# Altium PCB NBIOT.PcbDoc (part 3 of 3)
Units mm, origin at the board's own origin, x right, y up, seen from the top; angles counter-clockwise.
Board outline 152.4 x 101.6 mm, 2 copper layers (Top Layer, Bottom Layer); 66 components, 55 nets, 202 pads, 65 vias.
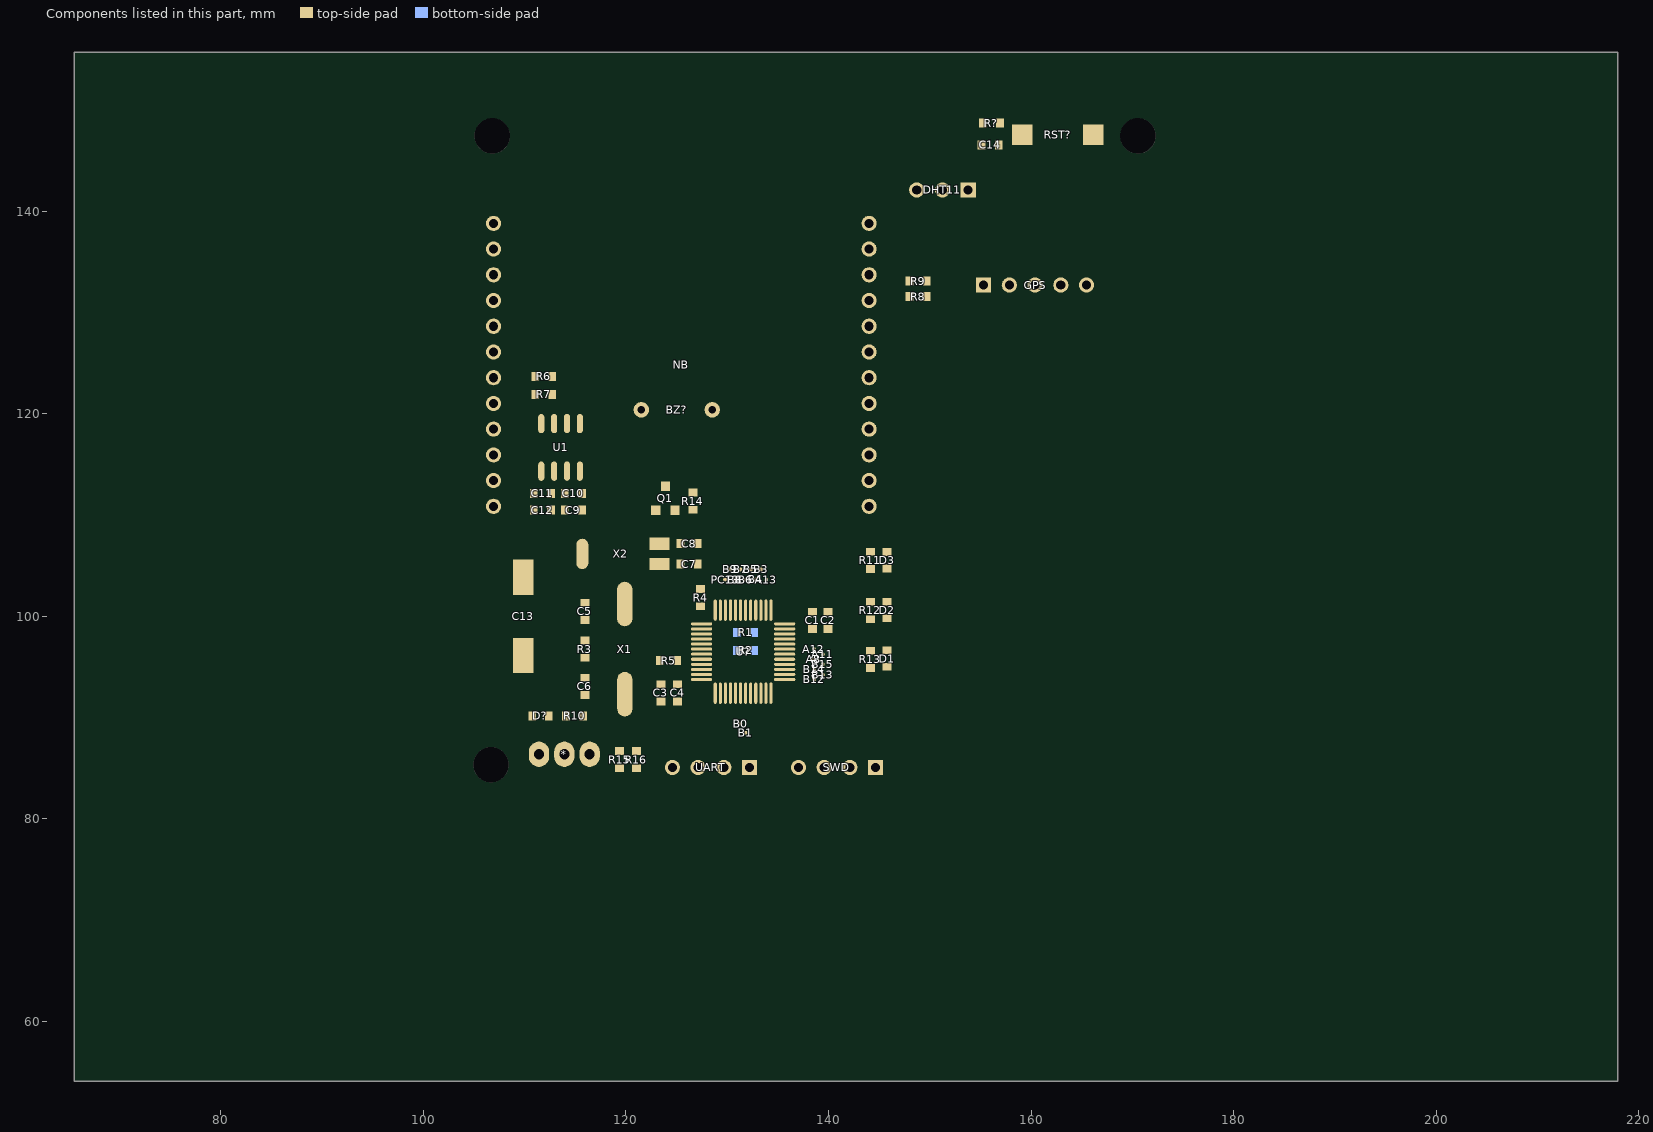
[diagram p3: the components of this part, seen from the top]

## Via types
v1: diameter 0.457, hole 0.305, Top Layer to Bottom Layer, 57 vias
v2: diameter 1.27, hole 0.711, Top Layer to Bottom Layer, 6 vias
v3: diameter 2.032, hole 1.27, Top Layer to Bottom Layer, 2 vias

## Nets (pads, with @x,y where several pads share a name; then routed paths per layer and width w, separated by ;. In a path a pad name is that pad's centre, name@x,y a point inside that pad or via, vN(x,y) a via of type N, cw(c..) or ccw(c..) an arc to the next point about the centre after c; other vN are vias at no path point) (continued)
copper on no net: (continued)
  Top Layer w0.015: 166.558,140.548 166.726,140.548 ; 166.558,140.564 166.726,140.564 ; 166.558,140.579 166.726,140.579 ; 166.573,137.912 167.869,137.912 ; 166.573,137.927 167.869,137.927 ; 166.573,137.942 167.869,137.942 ; 166.573,137.958 167.869,137.958 ; 166.573,137.973 167.869,137.973 ; 166.573,138.003 167.853,138.003 ; 166.573,140.122 166.832,140.122 ; 166.573,140.137 166.832,140.137 ; 166.573,140.152 166.832,140.152 ; 166.573,140.167 166.832,140.167 ; 166.573,140.183 166.832,140.183 ; 166.573,140.198 166.832,140.198 ; 166.573,140.213 166.787,140.213 ; 166.573,140.228 166.787,140.228 ; 166.573,140.244 166.787,140.244 ; 166.573,140.259 166.787,140.259 ; 166.573,140.274 166.787,140.274 ; 166.573,140.289 166.787,140.289 ; 166.573,140.305 166.787,140.305 ; 166.573,140.32 166.787,140.32 ; 166.573,140.335 166.787,140.335 ; 166.573,140.35 166.787,140.35 ; 166.573,140.365 166.787,140.365 ; 166.573,140.381 166.741,140.381 ; 166.573,140.396 166.741,140.396 ; 166.573,140.411 166.741,140.411 ; 166.573,140.426 166.741,140.426 ; 166.573,140.442 166.741,140.442 ; 166.588,137.988 166.604,137.988 ; 166.588,144.8 166.832,144.8 ; 166.619,137.988 167.853,137.988 ; 166.619,138.019 167.869,138.019 ; 166.619,138.034 167.853,138.034 ; 166.619,138.049 167.853,138.049 ; 166.619,138.064 167.853,138.064 ; 166.619,139.847 166.848,139.847 ; 166.619,139.893 166.848,139.893 ; 166.619,139.908 166.832,139.908 ; 166.619,139.924 166.832,139.924 ; 166.619,139.939 166.832,139.939 ; 166.619,139.954 166.832,139.954 ; 166.619,139.969 166.832,139.969 ; 166.619,139.984 166.832,139.984 ; 166.619,140 166.832,140 ; 166.619,140.015 166.832,140.015 ; 166.619,140.03 166.832,140.03 ; 166.619,140.045 166.832,140.045 ; 166.619,140.061 166.832,140.061 ; 166.619,140.076 166.832,140.076 ; 166.619,140.091 166.832,140.091 ; 166.619,140.106 166.832,140.106 ; 166.634,138.079 167.853,138.079 ; 166.634,138.095 167.853,138.095 ; 166.634,138.11 167.853,138.11 ; 166.634,139.695 166.848,139.695 ; 166.634,139.71 166.848,139.71 ; 166.634,139.725 166.848,139.725 ; 166.634,139.741 166.848,139.741 ; 166.634,139.756 166.848,139.756 ; 166.634,139.771 166.848,139.771 ; 166.634,139.786 166.848,139.786 ; 166.634,139.802 166.848,139.802 ; 166.634,139.817 166.848,139.817 ; 166.634,139.832 166.848,139.832 ; 166.634,139.863 166.848,139.863 ; 166.634,139.878 166.848,139.878 ; 166.634,144.16 166.848,144.16 ; 166.649,140.823 166.665,140.823 ; 166.649,144.069 166.665,144.069 ; 166.649,144.084 166.665,144.084 ; 166.665,138.125 167.853,138.125 ; 166.665,139.634 166.848,139.634 ; 166.665,139.649 166.848,139.649 ; 166.665,139.664 166.848,139.664 ; 166.665,139.68 166.848,139.68 ; 166.68,138.14 167.808,138.14 ; 166.68,138.156 167.808,138.156 ; 166.68,138.171 167.808,138.171 ; 166.68,138.186 167.808,138.186 ; 166.68,138.201 167.808,138.201 ; 166.68,138.217 167.808,138.217 ; 166.68,138.232 167.808,138.232 ; 166.68,138.247 167.808,138.247 ; 166.68,138.262 167.808,138.262 ; 166.68,138.278 167.808,138.278 ; 166.68,138.293 167.762,138.293 ; 166.68,138.308 167.762,138.308 ; 166.68,138.323 167.762,138.323 ; 166.68,138.339 167.747,138.339 ; 166.68,138.354 166.71,138.354 ; 166.68,138.369 166.71,138.369 ; 166.68,139.192 166.695,139.192 ; 166.68,139.207 166.71,139.207 ; 166.68,139.222 166.71,139.222 ; 166.68,139.238 167,139.238 ; 166.68,139.253 166.954,139.253 ; 166.68,139.268 166.939,139.268 ; 166.68,139.283 166.939,139.283 ; 166.68,139.299 166.939,139.299 ; 166.68,139.314 166.893,139.314 ; 166.68,139.329 166.893,139.329 ; 166.68,139.344 166.893,139.344 ; 166.68,139.36 166.893,139.36 ; 166.68,139.375 166.893,139.375 ; 166.68,139.39 166.893,139.39 ; 166.68,139.405 166.893,139.405 ; 166.68,139.421 166.893,139.421 ; 166.68,139.436 166.893,139.436 ; 166.68,139.451 166.893,139.451 ; 166.68,139.466 166.893,139.466 ; 166.68,139.482 166.893,139.482 ; 166.68,139.497 166.893,139.497 ; 166.68,139.512 166.893,139.512 ; 166.68,139.527 166.893,139.527 ; 166.68,139.543 166.893,139.543 ; 166.68,139.558 166.893,139.558 ; 166.68,139.573 166.878,139.573 ; 166.68,139.588 166.848,139.588 ; 166.68,139.603 166.848,139.603 ; 166.68,139.619 166.848,139.619 ; 166.68,144.175 166.848,144.175 ; 166.68,144.191 166.848,144.191 ; 166.68,144.206 166.878,144.206 ; 166.68,144.831 166.893,144.831 ; 166.68,144.846 166.878,144.846 ; 166.695,144.816 166.848,144.816 ; 166.71,140.594 166.726,140.594 ; 166.726,138.354 167.701,138.354 ; 166.726,138.369 167.701,138.369 ; 166.726,138.384 167.701,138.384 ; 166.726,138.4 167.686,138.4 ; 166.726,138.415 167.655,138.415 ; 166.726,138.43 167.686,138.43 ; 166.726,138.445 167.655,138.445 ; 166.726,138.46 167.64,138.46 ; 166.726,138.476 167.64,138.476 ; 166.726,138.491 167.64,138.491 ; 166.726,138.506 167.594,138.506 ; 166.726,138.521 167.594,138.521 ; 166.726,138.537 167.594,138.537 ; 166.726,138.552 167.594,138.552 ; 166.726,138.567 167.579,138.567 ; 166.726,138.582 167.579,138.582 ; 166.726,138.598 167.579,138.598 ; 166.726,138.613 167.533,138.613 ; 166.726,138.628 167.533,138.628 ; 166.726,138.643 167.533,138.643 ; 166.726,138.659 167.488,138.659 ; 166.726,138.674 167.488,138.674 ; 166.726,138.689 167.488,138.689 ; 166.726,138.704 167.488,138.704 ; 166.726,138.72 167.488,138.72 ; 166.726,138.735 167.472,138.735 ; 166.726,138.75 167.488,138.75 ; 166.726,138.765 167.442,138.765 ; 166.726,138.781 167.427,138.781 ; 166.726,138.796 167.427,138.796 ; 166.726,138.811 167.427,138.811 ; 166.726,138.826 167.381,138.826 ; 166.726,138.841 167.381,138.841 ; 166.726,138.857 167.381,138.857 ; 166.726,138.872 167.381,138.872 ; 166.726,138.887 167.32,138.887 ; 166.726,138.902 167.32,138.902 ; 166.726,138.918 167.32,138.918 ; 166.726,138.933 167.274,138.933 ; 166.726,138.948 167.274,138.948 ; 166.726,138.963 167.274,138.963 ; 166.726,138.979 167.274,138.979 ; 166.726,138.994 167.213,138.994 ; 166.726,139.009 167.213,139.009 ; 166.726,139.024 167.213,139.024 ; 166.726,139.04 167.213,139.04 ; 166.726,139.055 167.168,139.055 ; 166.726,139.07 167.168,139.07 ; 166.726,139.085 167.168,139.085 ; 166.726,139.101 167.107,139.101 ; 166.726,139.116 167.107,139.116 ; 166.726,139.131 167.107,139.131 ; 166.726,139.146 167.107,139.146 ; 166.726,139.162 167.046,139.162 ; 166.726,139.177 167.046,139.177 ; 166.726,139.192 167.046,139.192 ; 166.726,139.207 167,139.207 ; 166.726,139.222 166.954,139.222 ; 166.741,144.221 166.756,144.221 ; 166.756,140.381 166.787,140.381 ; 166.771,144.221 166.893,144.221 ; 166.787,144.236 166.893,144.236 ; 166.787,144.252 166.893,144.252 ; 166.787,144.267 166.893,144.267 ; 166.787,144.297 166.817,144.297 ; 166.787,144.861 166.939,144.861 ; 166.787,144.877 166.954,144.877 ; 166.787,144.892 166.954,144.892 ; 166.787,144.907 166.817,144.907 ; 166.802,143.566 166.878,143.566 ; 166.802,144.282 166.817,144.282 ; 166.817,140.213 166.832,140.213 ; 166.817,144.145 166.832,144.145 ; 166.817,144.77 166.832,144.77 ; 166.832,144.282 166.939,144.282 ; 166.832,144.297 166.939,144.297 ; 166.832,144.313 166.939,144.313 ; 166.832,144.328 166.954,144.328 ; 166.832,144.907 166.954,144.907 ; 166.848,144.343 167,144.343 ; 166.848,144.358 166.969,144.358 ; 166.848,144.922 167,144.922 ; 166.848,144.937 167,144.937 ; 166.848,144.953 167,144.953 ; 166.863,144.816 166.878,144.816 ; 166.893,143.459 167.229,143.459 ; 166.893,144.374 167,144.374 ; 166.893,144.389 167.046,144.389 ; 166.893,144.404 167.046,144.404 ; 166.893,144.419 167.046,144.419 ; 166.893,144.968 167.046,144.968 ; 166.893,144.983 167.046,144.983 ; 166.893,144.998 167.046,144.998 ; 166.908,145.014 167.046,145.014 ; 166.939,144.435 167.061,144.435 ; 166.939,144.45 167.061,144.45 ; 166.939,144.465 167.061,144.465 ; 166.939,145.029 167.046,145.029 ; 166.939,145.044 167.061,145.044 ; 166.939,145.059 167.046,145.059 ; 166.954,144.48 167.107,144.48 ; 166.954,145.075 167.046,145.075 ; 166.954,145.105 166.985,145.105 ; 166.985,139.222 167,139.222 ; 166.985,144.358 167,144.358 ; 167,143.444 167.015,143.444 ; 167,144.496 167.152,144.496 ; 167,144.511 167.152,144.511 ; 167,144.526 167.152,144.526 ; 167,145.105 167.046,145.105 ; 167.03,143.429 167.335,143.429 ; 167.03,144.541 167.152,144.541 ; 167.046,143.413 167.335,143.413 ; 167.046,143.444 167.335,143.444 ; 167.046,144.556 167.168,144.556 ; 167.046,144.572 167.152,144.572 ; 167.061,144.587 167.122,144.587 ; 167.076,144.45 167.107,144.45 ; 167.076,144.465 167.091,144.465 ; 167.137,143.398 167.488,143.398 ; 167.137,144.587 167.152,144.587 ; 167.198,143.368 167.488,143.368 ; 167.198,143.383 167.488,143.383 ; 167.213,143.353 167.625,143.353 ; 167.244,143.459 167.259,143.459 ; 167.32,143.322 167.975,143.322 ; 167.335,143.307 167.35,143.307 ; 167.335,143.337 167.35,143.337 ; 167.366,143.307 167.975,143.307 ; 167.366,143.337 167.975,143.337 ; 167.442,143.292 167.945,143.292 ; 167.488,143.276 167.777,143.276 ; 167.564,143.261 167.762,143.261 ; 167.686,143.353 168.021,143.353 ; 167.777,143.383 167.792,143.383 ; 167.823,143.276 167.853,143.276 ; 167.853,143.261 167.914,143.261 ; 167.869,143.383 168.067,143.383 ; 167.884,137.759 167.899,137.759 ; 167.884,143.368 168.036,143.368 ; 167.899,143.398 168.067,143.398 ; 167.945,137.409 167.96,137.409 ; 167.945,137.424 167.96,137.424 ; 167.945,137.439 167.96,137.439 ; 167.96,143.429 168.128,143.429 ; 167.96,143.444 168.128,143.444 ; 167.975,143.413 168.082,143.413 ; 167.975,143.459 168.143,143.459 ; 167.991,136.449 168.006,136.449 ; 168.006,143.49 168.173,143.49 ; 168.021,143.474 168.173,143.474 ; 168.021,143.505 168.173,143.505 ; 168.067,143.52 168.189,143.52 ; 168.067,143.551 168.189,143.551 ; 168.082,143.535 168.189,143.535 ; 168.082,143.566 168.234,143.566 ; 168.082,143.581 168.234,143.581 ; 168.082,143.596 168.234,143.596 ; 168.082,143.612 168.234,143.612 ; 168.128,143.627 168.25,143.627 ; 168.143,143.642 168.25,143.642 ; 168.143,143.657 168.25,143.657 ; 168.143,143.673 168.25,143.673 ; 168.189,143.688 168.295,143.688 ; 168.189,143.703 168.295,143.703 ; 168.189,143.718 168.295,143.718 ; 168.204,143.734 168.295,143.734 ; 168.219,143.749 168.295,143.749 ; 168.219,143.764 168.311,143.764 ; 168.234,143.779 168.341,143.779 ; 168.234,143.794 168.356,143.794 ; 168.234,143.81 168.356,143.81 ; 168.234,143.825 168.341,143.825 ; 168.234,143.84 168.341,143.84 ; 168.25,143.855 168.28,143.855 ; 168.265,143.673 168.28,143.673 ; 168.265,143.871 168.295,143.871 ; 168.295,143.855 168.326,143.855 ; 168.311,143.871 168.341,143.871

## Polygon pours and split planes (outlines as drawn)
GND on Top Layer "Bottom Layer-No Net" (solid, pour order 8): 104.394,108.966 147.574,108.966 147.593,108.947 147.593,82.677 104.267,82.677
GND on Bottom Layer "Bottom Layer-No Net" (solid, pour order 10): 104.267,108.839 147.593,108.839 147.593,82.677 147.339,82.931 104.267,82.931

## Keep-outs
Top Overlay:
  lines w0.254: 147.72,125.076 147.72,130.302 ; 147.82,125.095 172.847,125.095 172.847,130.302 147.82,130.302
Keep-Out Layer:
  lines w0.254: 104.267,82.677 147.593,82.677 147.593,124.714 173.101,124.714 173.101,149.86 104.267,149.86 104.267,82.677

## Other copper
Top Layer:
  region net GND: 149.352,148.463 148.082,148.463 148.082,141.732 149.352,141.732
  region net GND: 155.575,149.225 148.082,149.225 148.082,147.447 155.575,147.447
Bottom Layer:
  region net GND: 130.048,113.284 128.778,113.284 128.778,107.188 130.048,107.188

## Silkscreen, mask and mechanical layers (free items; w line width, h text height)
Top Overlay:
Top Solder:
  region: 142.113,148.717 111.379,148.717 111.379,145.288 142.113,145.288
  region: 168.402,145.288 157.607,145.288 157.607,135.89 168.402,135.89
Mechanical 16:
  drawing of 1873 lines, arcs and shapes, not listed